# EAGLE board ReptileHeatMat-V1 (EAGLE 9.6.2)
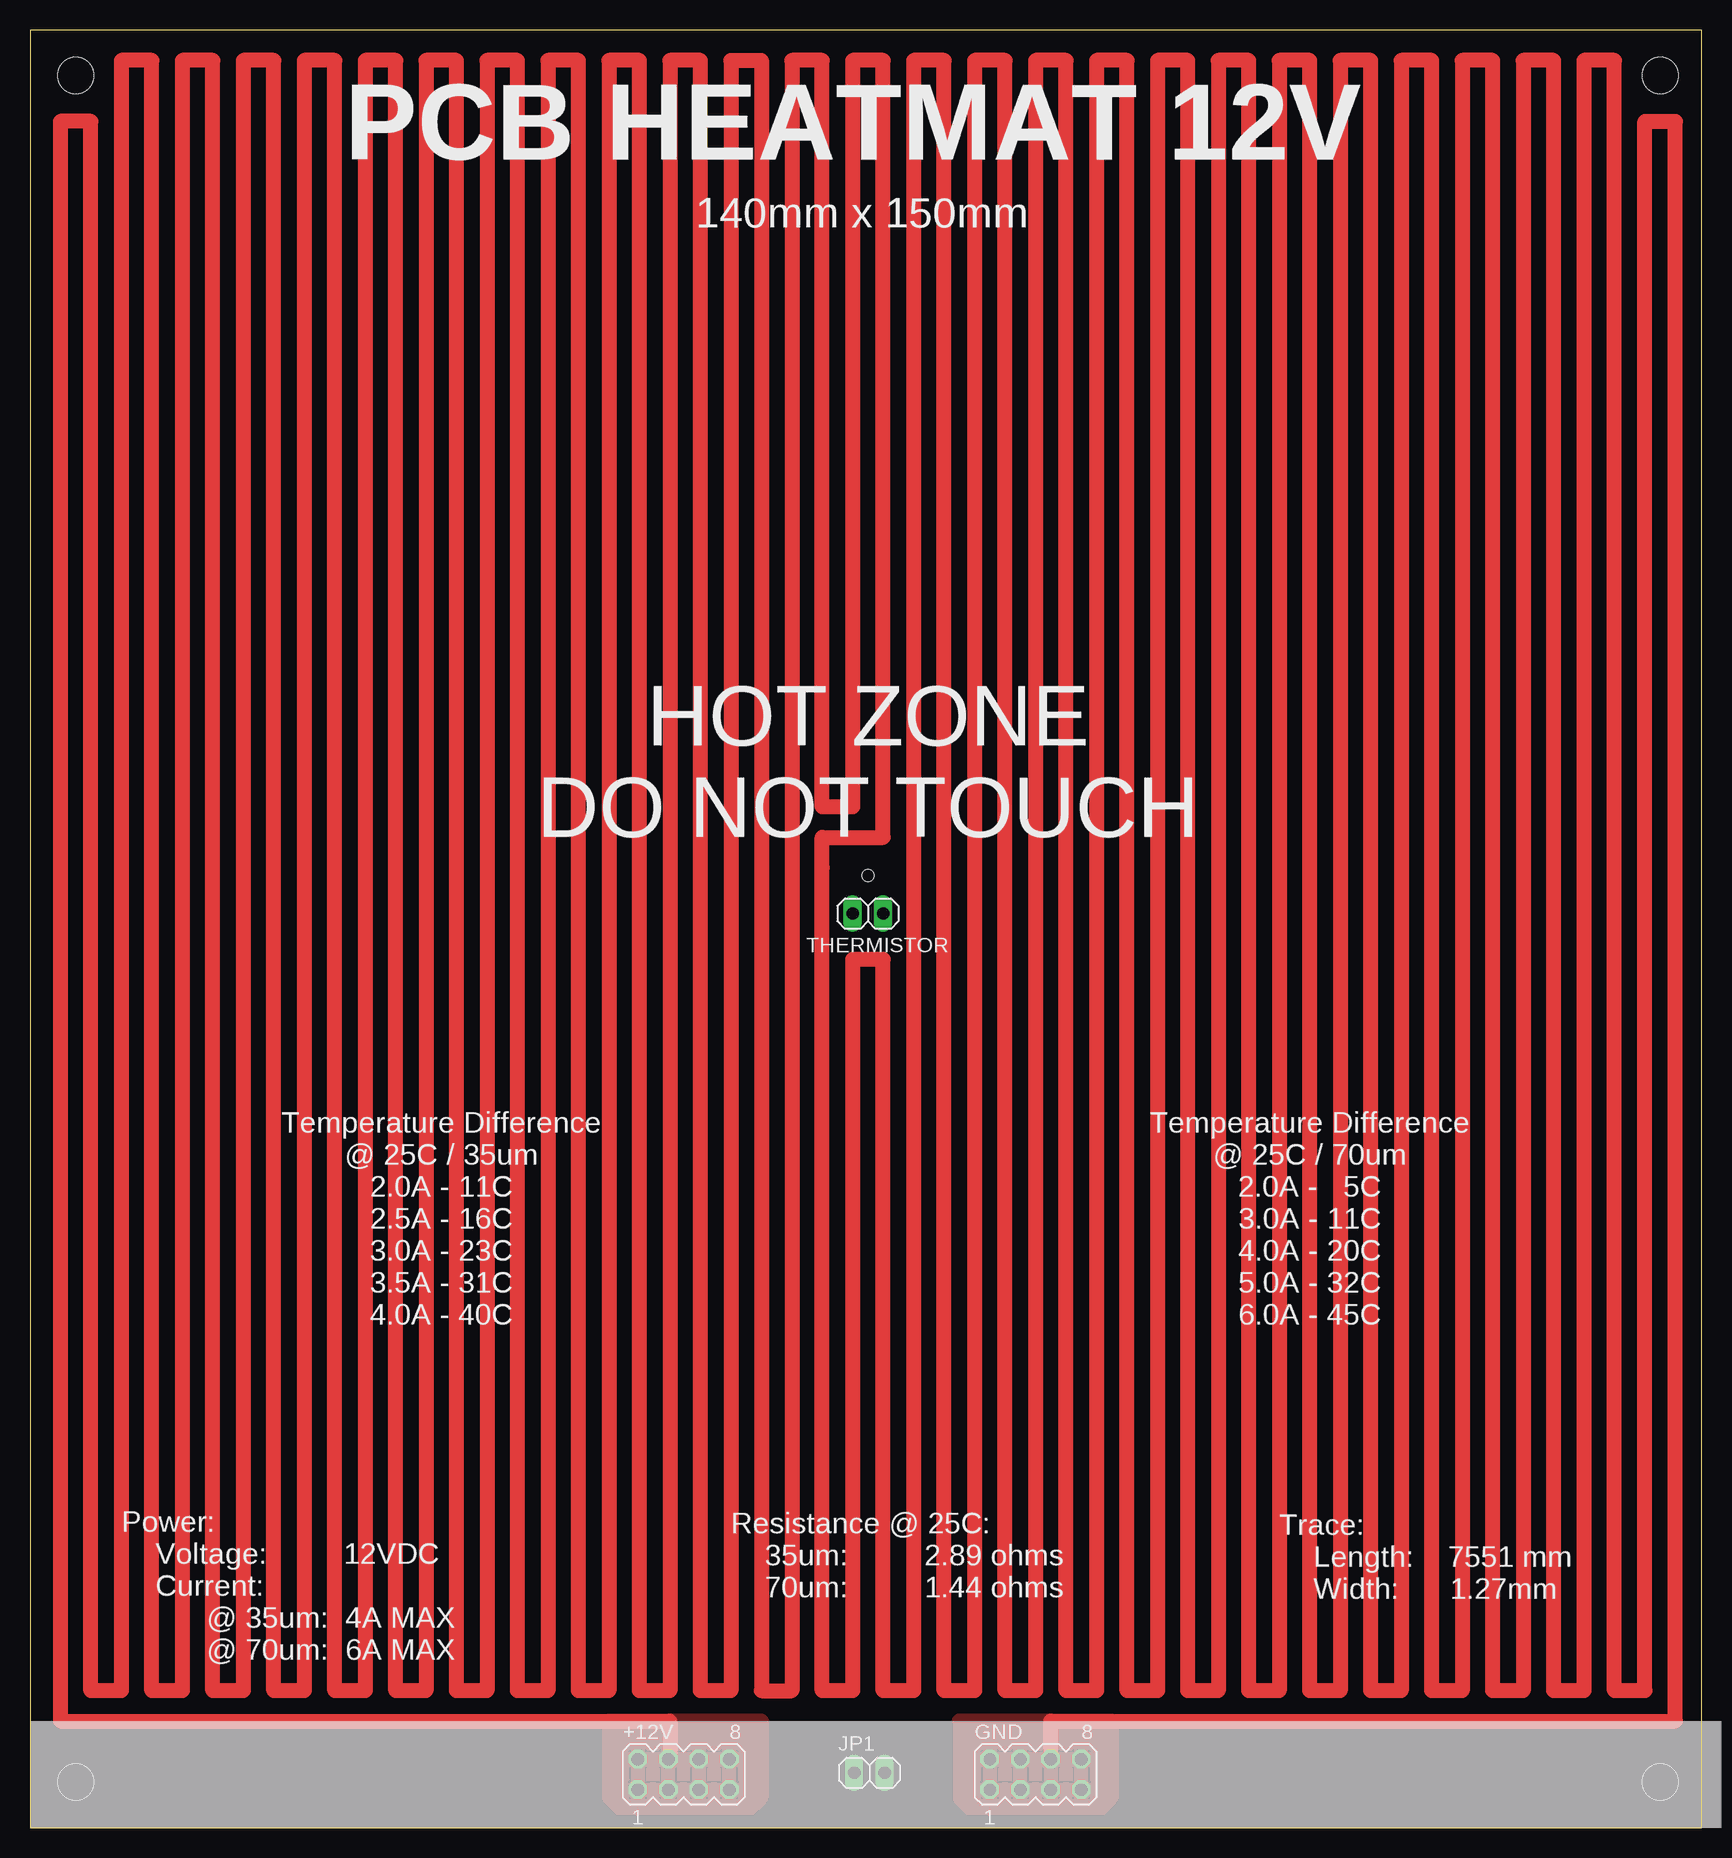
[diagram p0: board, top side]
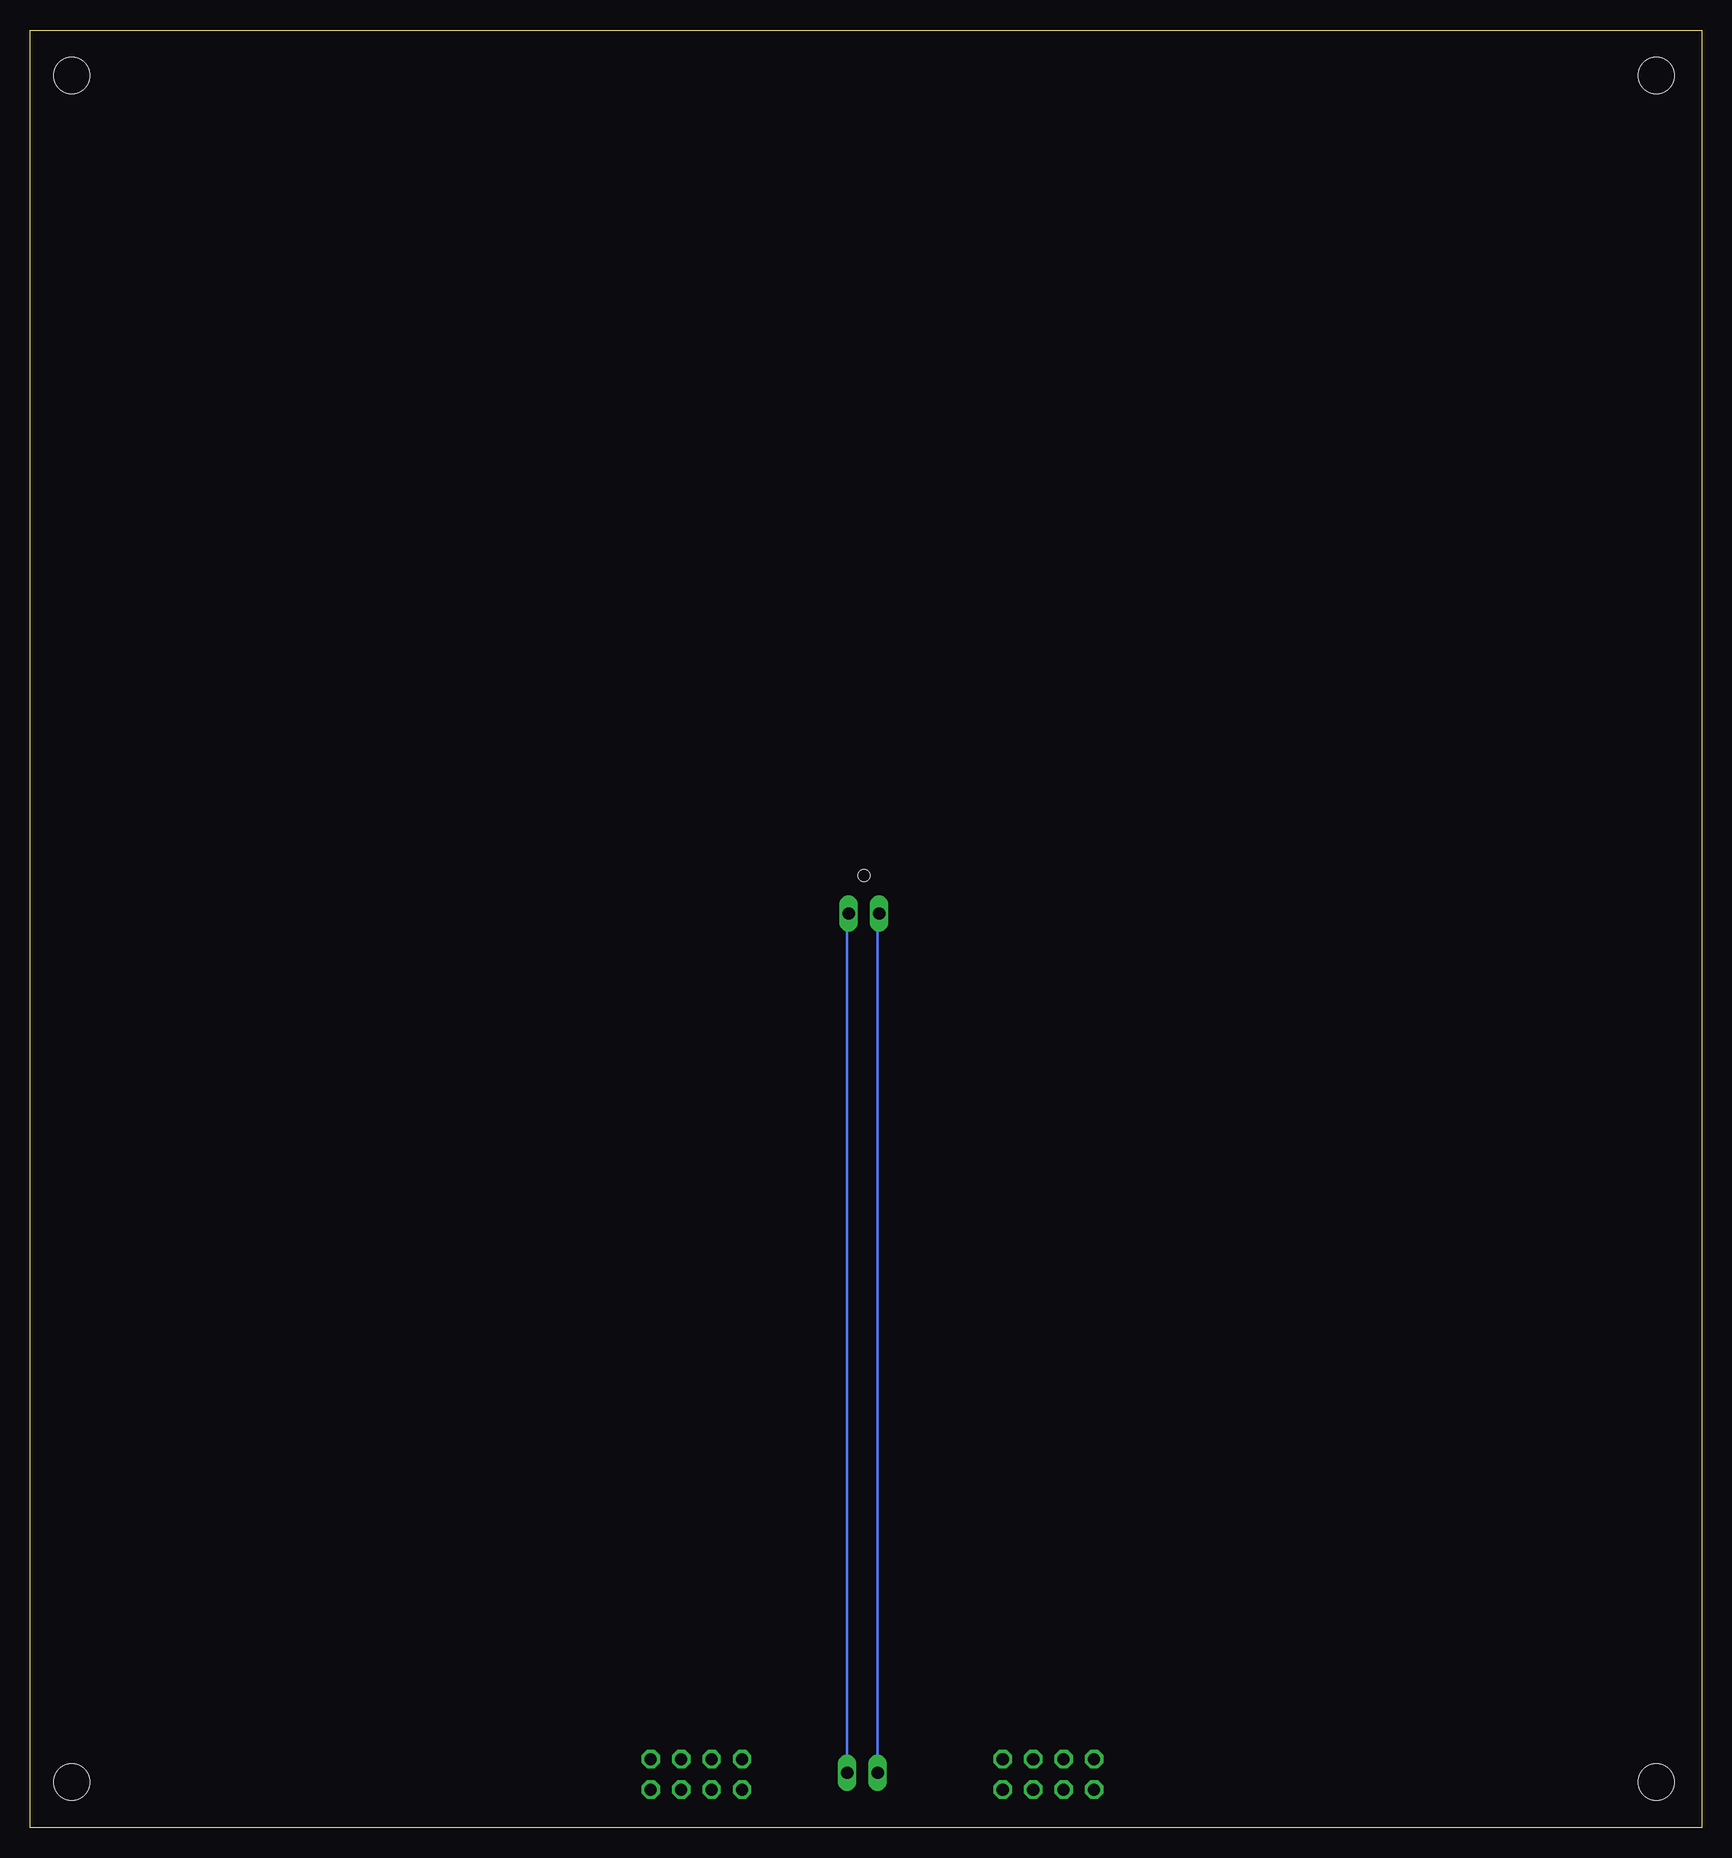
[diagram p1: board, bottom side, seen from below]

Size 139.37 x 149.85 mm. Coordinates in mm from the lower left corner, seen from the top.
Outline: 0,0 139.37,0 139.37,149.85 0,149.85 0,0
Copper layers (1*16): Top 0.035mm / dielectric 1.5mm / Bottom 0.035mm
Design rules "default": minimum track width 6mil, minimum drill 0.35mm, track to track 6mil, track to pad 6mil, pad to pad 6mil, via to via 6mil, smd to smd 6mil, copper to edge 40mil, drill to drill 6mil, minimum pad ring 10mil, minimum via ring 8mil, stop-mask expansion 4mil, vias tented up to drill 0mil, thermal gap 10mil
Holes 1 mm at 69.85,79.38
Holes 3 mm at 3.81,3.81 135.89,3.81 3.81,146.05 135.89,146.05

## Footprints (pad centres in the part's own frame; a part is rotated, then mirrored left to right if it is on the bottom)
MA04-2 = drill 1.016 octagon: 1 -3.81,-1.27; 2 -3.81,1.27; 3 -1.27,-1.27; 4 -1.27,1.27; 5 1.27,-1.27; 6 1.27,1.27; 7 3.81,-1.27; 8 3.81,1.27
1X02 = drill 1.016 long: 1 -1.27,0; 2 1.27,0

## Placement (x,y rotation side)
+12V  [MA04-2]  54.48,4.45 0 top
GND  [MA04-2]  83.82,4.45 0 top
JP1  Thermistor  [1X02]  69.98,4.57 0 top
THERMISTOR  [1X02]  69.85,76.2 0 top

## Library data of the parts
+12V GND = con-lstb; OC_FARNELL: unknown; OC_NEWARK: unknown
JP1 THERMISTOR = pinhead

## Nets
+12V: +12V.1 +12V.2 +12V.3 +12V.4 +12V.5 +12V.6 +12V.7 +12V.8 GND.1 GND.2 GND.3 GND.4 GND.5 GND.6 GND.7 GND.8
N$7: JP1.2 THERMISTOR.2
N$8: JP1.1 THERMISTOR.1

## Tracks (layer width: path | path; a pad name or v marks a point on that pad's centre or on a via)
+12V
  Top 1.27: GND.6 85.09,8.89 137.16,8.89 137.16,142.24 134.62,142.24 134.62,11.43 132.08,11.43 132.08,147.32 129.54,147.32 129.54,11.43 127,11.43 127,147.32 124.46,147.32 124.46,11.43 121.92,11.43 121.92,147.32 119.38,147.32 119.38,11.43 116.84,11.43 116.84,147.32 114.3,147.32 114.3,11.43 111.76,11.43 111.76,147.32 109.22,147.32 109.22,11.43 106.68,11.43 106.68,147.32 104.14,147.32 104.14,11.43 101.6,11.43 101.6,147.32 99.06,147.32 99.06,11.43 96.52,11.43 96.52,147.32 93.98,147.32 93.98,11.43 91.44,11.43 91.44,147.32 88.9,147.32 88.9,11.43 86.36,11.43 86.36,147.32 83.82,147.32 83.82,11.43 81.28,11.43 81.28,147.32 78.74,147.32 78.74,11.43 76.2,11.43 76.2,147.32 73.66,147.32 73.66,11.43 71.12,11.43 71.12,72.39 68.58,72.39 68.58,11.43 66.04,11.43 66.04,80.01 66.04,82.55 71.12,82.55 71.12,147.32 68.58,147.32 68.58,85.09 66.04,85.09 66.04,147.32 63.5,147.32 63.5,11.43 60.96,11.43 60.96,147.32 58.42,147.32 58.42,11.43 55.88,11.43 55.88,147.32 53.34,147.32 53.34,11.43 50.8,11.43 50.8,147.32 48.26,147.32 48.26,11.43 45.72,11.43 45.72,147.32 43.18,147.32 43.18,11.43 40.64,11.43 40.64,147.32 38.1,147.32 38.1,11.43 35.56,11.43 35.56,147.32 33.02,147.32 33.02,11.43 30.48,11.43 30.48,147.32 27.94,147.32 27.94,11.43 25.4,11.43 25.4,147.32 22.86,147.32 22.86,11.43 20.32,11.43 20.32,147.32 17.78,147.32 17.78,11.43 15.24,11.43 15.24,147.32 12.7,147.32 12.7,11.43 10.16,11.43 10.16,147.32 7.62,147.32 7.62,11.43 5.08,11.43 5.08,142.24 2.54,142.24 2.54,8.89 53.34,8.89 53.34,5.84 +12V.4
  pour Top: 77.47,2.54 78.74,1.27 88.9,1.27 90.17,2.54 90.17,8.89 77.47,8.89
  pour Top: 48.26,2.54 49.53,1.27 58.42,1.27 59.69,1.27 60.96,2.54 60.96,8.89 48.26,8.89
N$7
  Bottom 0.2: THERMISTOR.2 71.25,76.07 JP1.2
N$8
  Bottom 0.2: THERMISTOR.1 68.71,76.07 JP1.1

## Text on the board
tPlace: PCB HEATMAT 12V | 140mm x 150mm | HOT ZONE / DO NOT TOUCH | Temperature Difference / @ 25C / 35um / 2.0A - 11C / 2.5A - 16C / 3.0A - 23C / 3.5A - 31C / 4.0A - 40C | Temperature Difference / @ 25C / 70um / 2.0A - 5C / 3.0A - 11C / 4.0A - 20C / 5.0A - 32C / 6.0A - 45C | Trace: / Length: 7551 mm / Width: 1.27mm | Resistance @ 25C: / 35um: 2.89 ohms / 70um: 1.44 ohms | Power: / Voltage: 12VDC / Current: / @ 35um: 4A MAX / @ 70um: 6A MAX
tStop: THERM | GND | +12V